# Altium PCB PCB2.PcbDoc
Units mil, origin at the board's own origin, x right, y up, seen from the top; angles counter-clockwise.
Board outline 2045 x 645 mil, 6 copper layers (Top Layer, Mid Layer 1, Mid Layer 2, Mid Layer 3, Mid Layer 4, Bottom Layer), stack 62.874 mil thick; 21 components, 25 nets, 101 pads, 71 vias.
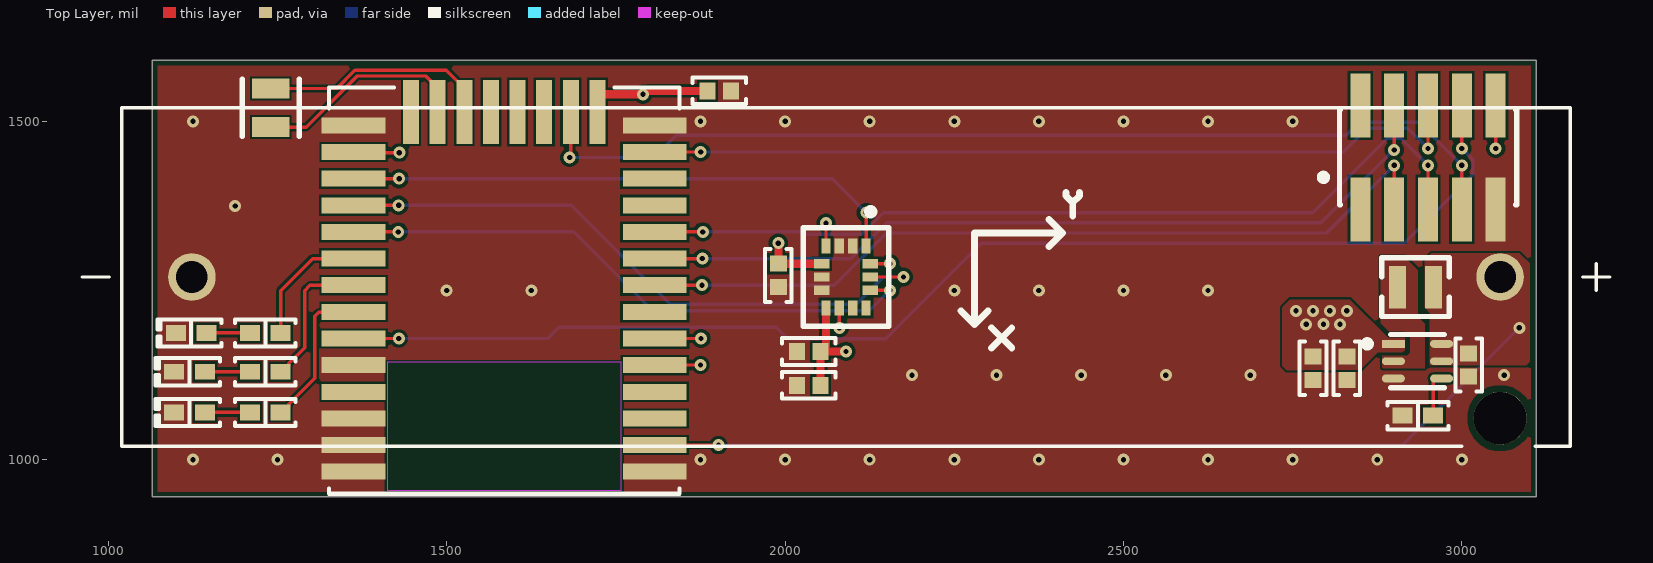
[diagram p0: Top Layer view]
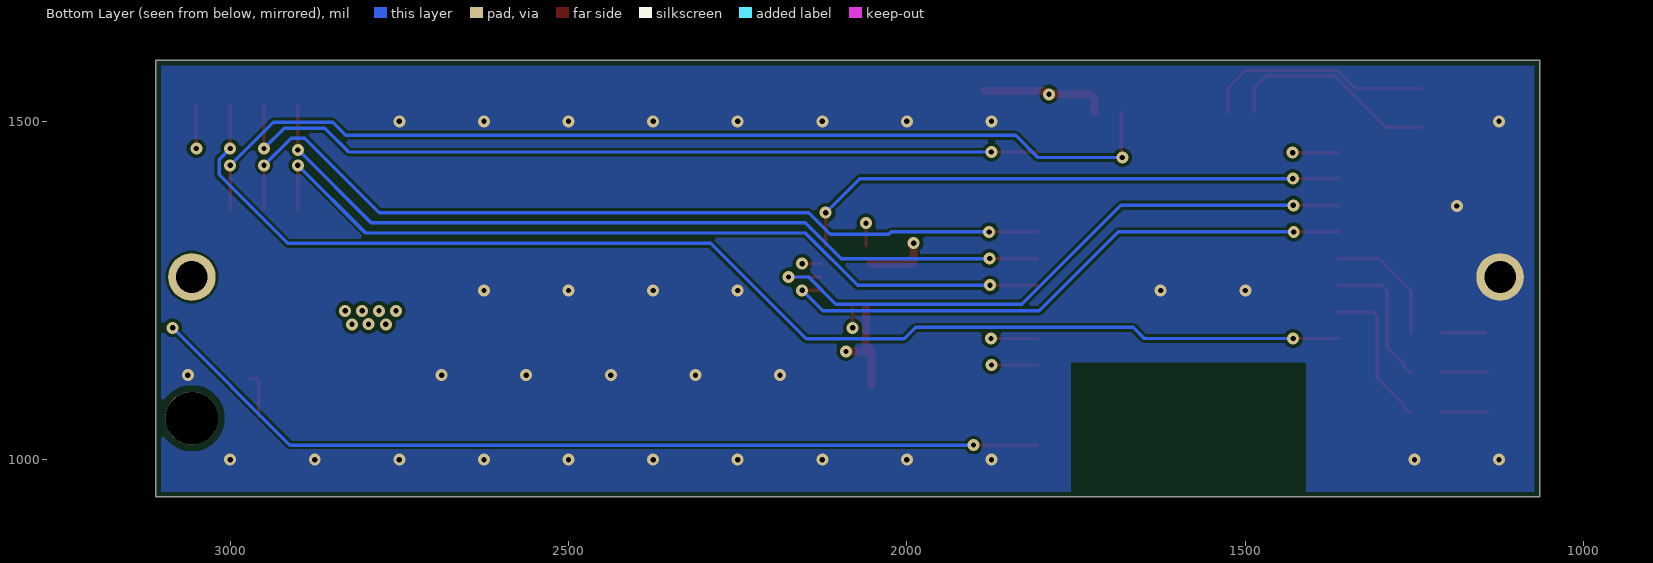
[diagram p1: Bottom Layer view, seen from below]
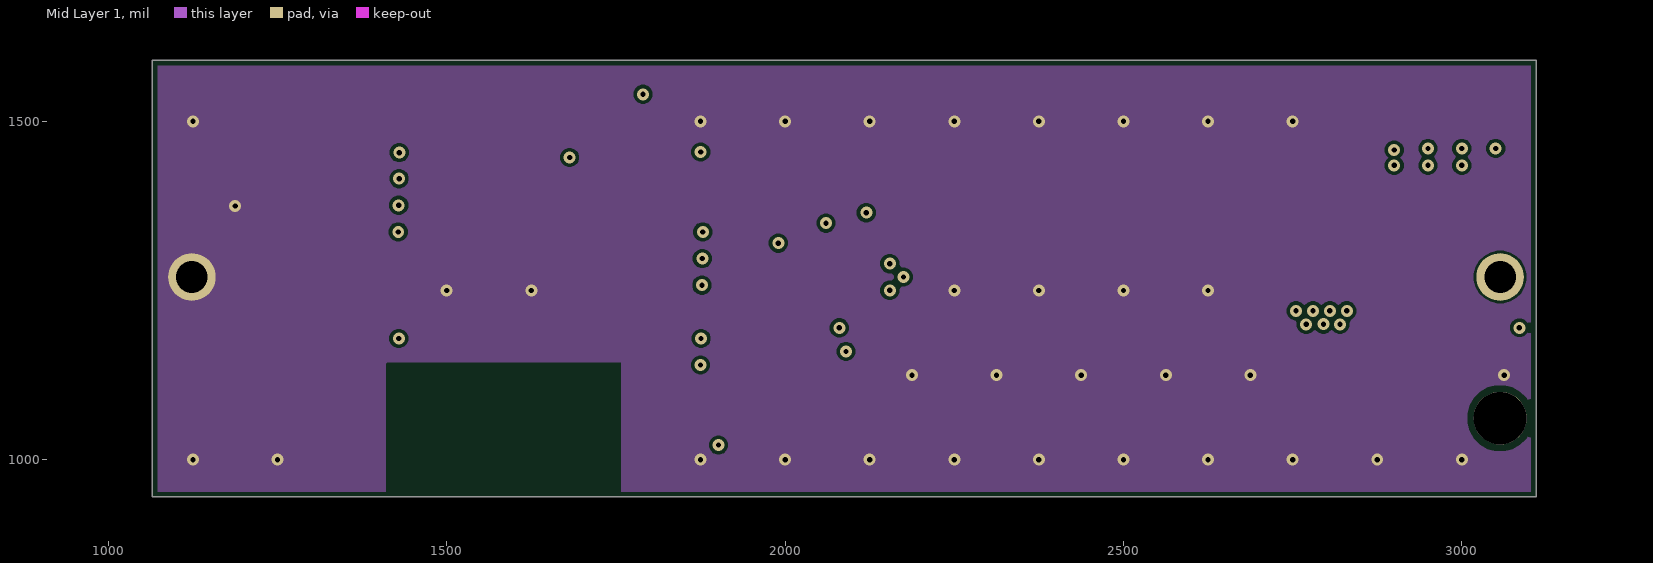
[diagram p2: Mid Layer 1]
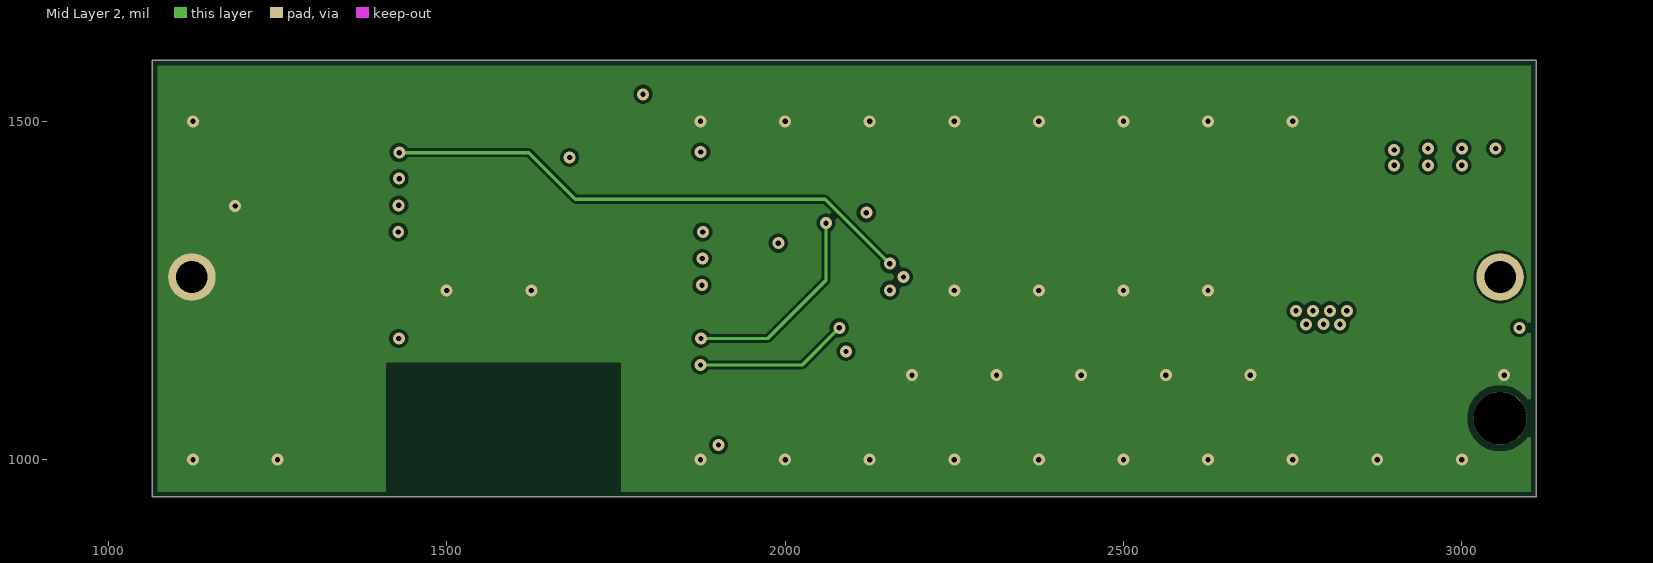
[diagram p3: Mid Layer 2]
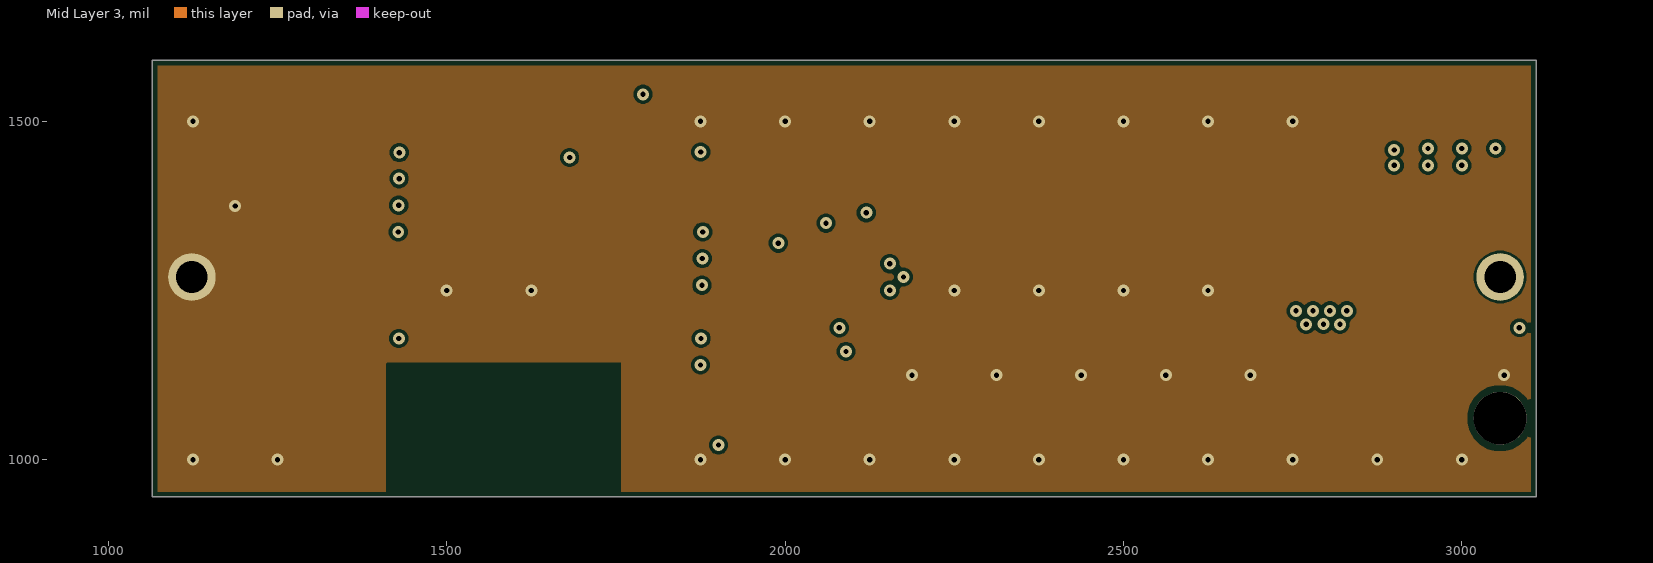
[diagram p4: Mid Layer 3]
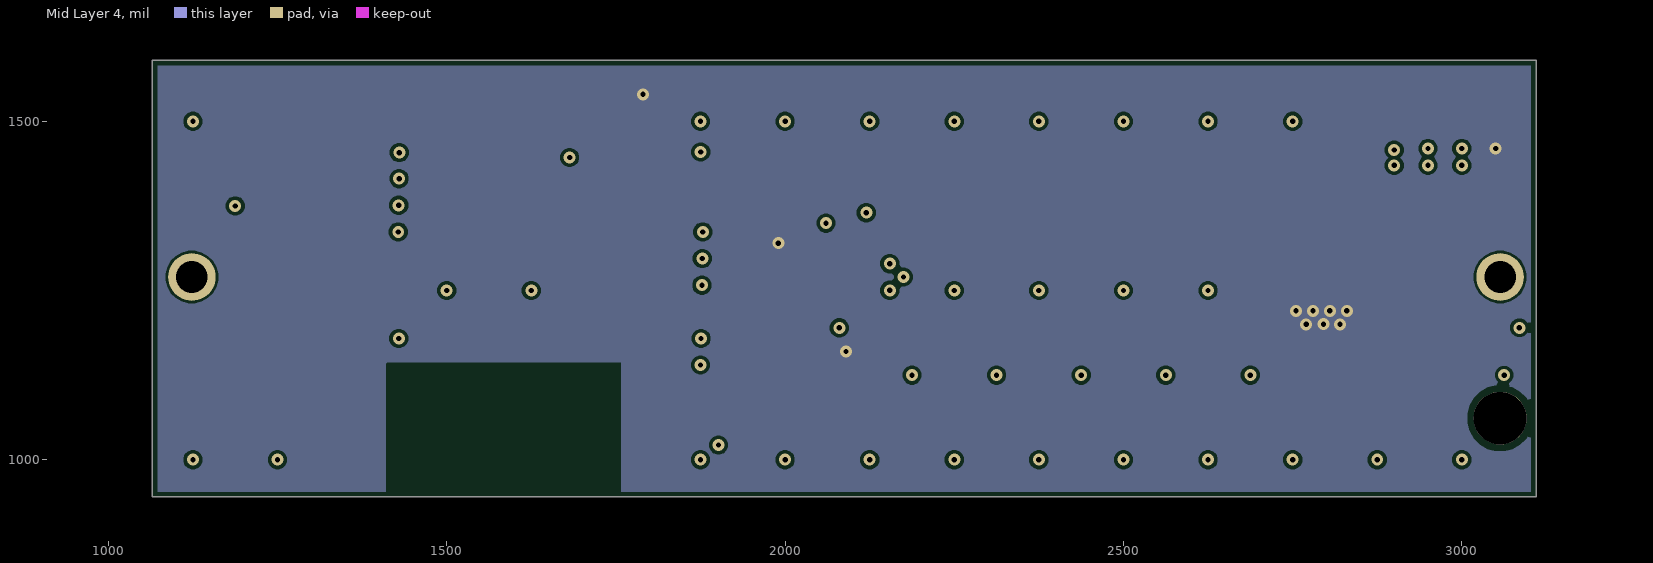
[diagram p5: Mid Layer 4]

## Layer stack, top to bottom
Top Solder: solder mask 0.5, Solder Resist, Dk 3.8
Top Layer: signal copper 1.378
Dielectric 1: prepreg 3.937, 2313, Dk 4.05
Mid Layer 1: signal copper 0.689
Core 1: core 22.2441, FR-4, Dk 4.5
Mid Layer 2: signal copper 0.689
Dielectric 2: prepreg 5, 2116, Dk 4.25
Mid Layer 3: signal copper 0.689
Core 2: core 22.2441, FR-4, Dk 4.5
Mid Layer 4: signal copper 0.689
Dielectric 3: prepreg 3.937, 2313, Dk 4.05
Bottom Layer: signal copper 1.378
Bottom Solder: solder mask 0.5, Solder Resist, Dk 3.8

## Board outline
1065,945 3110,945 3110,1590 1065,1590

## Design rules (kind name [scope] priority, off if disabled: settings)
BoardOutlineClearance [All] p1: gap=7.87 ignorepadtopadclearanceinfootprint=FALSE
Clearance [All] p1: gap=3.5 ignorepadtopadclearanceinfootprint=FALSE except(5: Arc-Via Track-Via SMDPad-Via THPad-Via Via-Via Via-Fill Via-Poly Via-Region Via-Text; 9.84: Arc-Hole Track-Hole SMDPad-Hole THPad-Hole Via-Hole Fill-Hole Poly-Hole Region-Hole Text-Hole)
ComponentClearance [All] p1: gap=3.5 collisioncheckmode=3 verticalgap=3.5 showdistances=TRUE
DiffPairsRouting [All] p1: maxlimit=3.5 minlimit=3.5 mostfreqgap=3.5 toplayer_minwidth=3.5 toplayer_maxwidth=71497.94 toplayer_prefwidth=3.5 midlayer1_minwidth=3.5 midlayer1_maxwidth=71497.94 midlayer1_prefwidth=3.5 midlayer2_minwidth=3.5 midlayer2_maxwidth=71497.94 midlayer2_prefwidth=3.5 midlayer3_minwidth=3.5 midlayer3_maxwidth=71497.94 midlayer3_prefwidth=3.5 midlayer4_minwidth=3.5 midlayer4_maxwidth=71497.94 midlayer4_prefwidth=3.5 bottomlayer_minwidth=3.5 bottomlayer_maxwidth=71497.94 bottomlayer_prefwidth=3.5 maxuncoupledlength=500
Height [All] p1: minheight=0 maxheight=71497.94 prefheight=500
HoleSize [All] p1: absolutevalues=TRUE maxlimit=248.03 minlimit=7.87 maxpercent=80.000 minpercent=20.000
HoleToHoleClearance [All] p1: gap=9.84 allowstackedmicrovias=FALSE
MinimumAnnularRing [All] p1: minimumring=3
MinimumSolderMaskSliver [All] p1: minsoldermaskwidth=0
PlaneClearance [All] p1: clearance=3.5
PlaneConnect PlaneConnectPowerPads [InPadClass('PowerPads')] p1: planeconnectstyle=Direct reliefexpansion=20 reliefentries=4 reliefconductorwidth=10 reliefairgap=10
PlaneConnect [All] p2: planeconnectstyle=Direct reliefexpansion=11.81 reliefentries=4 reliefconductorwidth=3.5 reliefairgap=3.5
PolygonConnect PolygonConnectPowerPads [All vs (InPadClass('PowerPads'))] p1: connectstyle=Direct reliefconductorwidth=10 reliefentries=4 polygonreliefangle="90 Angle" airgapwidth=10
PolygonConnect [All] p2: connectstyle=Direct reliefconductorwidth=3.5 reliefentries=4 polygonreliefangle="90 Angle" airgapwidth=3.5
RoutingVias [All] p1: holewidth=7.87 width=17.72 viastyle="Through Hole" minholewidth=7.87 minwidth=17.72 maxholewidth=248.03 maxwidth=257.87
SilkToSilkClearance [All] p1: silktosilkclearance=0
SilkToSolderMaskClearance [IsPad] p1: minsilkscreentomaskgap=3.5 clearancetoexposedcopper=TRUE
SolderMaskExpansion SolderMaskExpansion_Via [IsVia] p1: expansion=2.95 istentingtop=TRUE
SolderMaskExpansion [All] p2: expansion=2.95 istentingtop=FALSE
Width [All] p1: maxlimit=71497.94 minlimit=3.5 preferedwidth=3.5
20 further rules are at their usual default settings.

## Classes and differential pairs
component class main: BT1 C1 C2 C3 C4 C5 C6 C7 D1 D2 D3 J1 L1 R1 U2 U3

## Components (designator, comment, footprint, x,y, rotation, side; value= is the part's Value field where it differs from the comment)
BT1 "" BAT_1075 2090,1270 r180 top
C1 "" "CAP 0402_1005" 2035,1160 r180 top value="10 µF"
C2 "" "CAP 0402_1005" 3010,1140 r270 top value="10 µF"
C3 "" "CAP 0402_1005" 1902.68,1545 r180 top value="0.1 µF"
C4 "" "CAP 0402_1005" 1990,1272.32 r90 top value="0.1 µF"
C5 "" "CAP 0402_1005" 2830,1135 r90 top value="0.1 µF"
C6 "" "CAP 0402_1005" 2780,1135 r90 top value="0.1 µF"
C7 "" "CAP 0402_1005" 2035,1110 r0 top value="0.1 µF"
D1 "" "LED 0402_1005 YELLOW" 1122.36,1187.36 r180 top value=Yellow
D2 "" "LED 0402_1005 YELLOW" 1120,1130 r180 top value=Yellow
D3 "" "LED 0402_1005 YELLOW" 1120,1070 r180 top value=Yellow
J1 "" FP-62131021021-MFG 2950,1446.77 r0 top
L1 "" "TDK VLS201612CX" 2931.57,1255 r180 top value="2.2 µH"
R1 "" "RES 0402_1005" 1231.87,1187.36 r0 top value="1.5 kOhms"
R2 "" "RES 0402_1005" 1231.87,1130 r0 top value="1.5 kOhms"
R3 "" "RES 0402_1005" 1231.87,1070 r0 top
R4 "" "RES 0402_1005" 2935,1065 r0 top value=80.6k
U1 "" xGM240P 1585,1250 r180 top
U2 "" FP-L622-1C-IPC_B 2934.43,1145.59 r0 top
U3 "" FP-LGA-14L-DM00249496-MFG 2090,1270 r270 top
Y1 "" FP-ABS06-MFG 1240,1520 r270 top

## Footprints (in the part's own frame and the unit in brackets; to place one, negate y for a bottom-side part, rotate by r counter-clockwise, add the part's x,y. Pads: shape width x height; smd on the part's side, far side on the other; paste and mask are expansions set on the pad)
BAT_1075 [mm]
  round 1.785 hole 1.19: N(24.55,0) P(-24.55,0)
  round 1.98 hole 1.98 unplated: ""(-24.55,5.3)
  silkscreen extent -28.66,-6.35 28.66,6.35
"CAP 0402_1005" [mm] "Chip Capacitor, 2-Leads, Body 1.02x0.51mm, IPC Medium Density"
  rect 0.6x0.64 smd: 1(-0.44,0) 2(0.44,0)
  silkscreen extent -1,-0.5 1,0.5, body extent -0.5,-0.26 0.5,0.26, height 0.52
FP-62131021021-MFG [mm]
  rect 0.75x2.4 smd paste+0 mask+0: 1(-2.54,-1.95) 2(-2.54,1.95) 3(-1.27,-1.95) 4(-1.27,1.95) 5(0,-1.95) 6(0,1.95) 7(1.27,-1.95) 8(1.27,1.95) 9(2.54,-1.95) 10(2.54,1.95)
  silkscreen extent -4.05,-1.78 3.32,1.78, body extent -3.42,-3.25 3.42,3.25, height 0.25
FP-ABS06-MFG [mm]
  rect 0.75x1.4 smd paste+0 mask+0: 1(-0.725,0) 2(0.725,0)
  silkscreen extent -1.07,-1.07 1.07,1.07, body extent -1.2,-0.8 1.2,0.8, height 0.25
FP-L622-1C-IPC_B [mm]
  rect 0.865x0.292 smd paste+0 mask+0: 1(-0.904,0.65)
  rrect100% 0.865x0.292 smd paste+0 mask+0: 2(-0.904,0) 3(-0.904,-0.65) 4(0.904,-0.65) 5(0.904,0) 6(0.904,0.65)
  silkscreen extent -2.01,-1 1,1, body extent -1.59,-1.25 1.59,1.25, height 0.25
FP-LGA-14L-DM00249496-MFG [mm]
  rect 0.575x0.35 smd paste-1000 mask+0: 1(-1.162,0.75) 2(-1.162,0.25) 3(-1.162,-0.25) 4(-1.162,-0.75) 8(1.162,-0.75) 9(1.162,-0.25) 10(1.162,0.25) 11(1.162,0.75)
  rect 0.35x0.575 smd paste-1000 mask+0: 5(-0.5,-0.913) 6(0,-0.913) 7(0.5,-0.913) 12(0.5,0.913) 13(0,0.913) 14(-0.5,0.913)
  silkscreen extent -2.57,-1.6 1.85,1.6, body extent -2.05,-1.8 2.05,1.8, height 0.25
"LED 0402_1005 YELLOW" [mm] "Chip Diode, 2-Leads, Body 1.00x0.50mm, IPC Medium Density"
  rect 0.75x0.6 smd: 1(-0.575,0) 2(0.575,0)
  silkscreen extent -1.14,-0.51 1.27,0.51, body extent -0.5,-0.25 0.5,0.25, height 0.21
"RES 0402_1005" [mm] "Chip Resistor, 2-Leads, Body 1.0x0.5mm, IPC Medium Density"
  rect 0.75x0.6 smd: 1(-0.575,0) 2(0.575,0)
  silkscreen extent -1.14,-0.51 1.14,0.51, body extent -0.5,-0.25 0.5,0.25, height 0.35
"TDK VLS201612CX" [mm] "Inductor, 2-Leads, Body 2.00x1.60mm, IPC Medium Density"
  rect 0.65x1.6 smd: 1(-0.675,0) 2(0.675,0)
  silkscreen extent -1.27,-1.1 1.27,1.1, body extent -1,-0.8 1,0.8, height 1.2
xGM240P [mm]
  rect 2.4x0.6 smd paste+0 mask+0: 1(-5.65,6.8) 2(-5.65,5.8) 3(-5.65,4.8) 4(-5.65,3.8) 5(-5.65,2.8) 6(-5.65,1.8) 7(-5.65,0.8) 8(-5.65,-0.2) 9(-5.65,-1.2) 10(-5.65,-2.2) 11(-5.65,-3.2) 12(-5.65,-4.2) 13(-5.65,-5.2) 14(-5.65,-6.2) 23(5.65,-6.2) 24(5.65,-5.2) 25(5.65,-4.2) 26(5.65,-3.2) 27(5.65,-2.2) 28(5.65,-1.2) 29(5.65,-0.2) 30(5.65,0.8) 31(5.65,1.8) 32(5.65,2.8) 33(5.65,3.8) 34(5.65,4.8) 35(5.65,5.8) 36(5.65,6.8)
  rect 0.6x2.4 smd paste+0 mask+0: 15(-3.5,-6.7) 16(-2.5,-6.7) 17(-1.5,-6.7) 18(-0.5,-6.7) 19(0.5,-6.7) 20(1.5,-6.7) 21(2.5,-6.7) 22(3.5,-6.7)
  Top Layer keep-out region: 4.4,2.7 4.4,7.5 -4.4,7.5 -4.4,2.7
  silkscreen extent -6.58,-7.63 6.58,7.63

## Part data
BT1: library part CMP-342-000000-1, Package=None, Availability=Unavailable, Component Type=Standard, Design Item ID=1075, MP=1075, Pin Count=2, price=None, Source=1075.SchLib
C1 C2 C3 C4 C6 C7: library part C0402C104K7PAC7867, "CAP CER 0.1UF 4V X5R 0402", Capacitance="0.1 µF", Device Package="0402 (1005 Metric)", Manufacturer=KEMET, Operating Temperature="-55°C ~ 85°C", Supplier Part Number 1=399-14871-1-ND, Temperature Coefficient=X5R, Tolerance=±10%, Voltage - Rated=4V, Applications="Bypass, Decoupling", componentlink1description=Datasheet, componentlink1url=https://api.kemet.com/component-edge/download/datasheet/C0402C104K7PAC7867.pdf, ComponentLink2Description="DigiKey Link", ComponentLink2URL=https://www.digikey.com/en/products/detail/kemet/C0402C104K7PAC7867/7381987, lastupdated="1/9/2022 12:30:40 pm", Lifecycle Status=Active, Minimum Order=1, Mounting Type="Surface Mount, MLCC", Package / Case="0402 (1005 Metric)", packaging=TapeAndReel, Part Number=C0402C104K7PAC7867, Part Status=Active, partid=5603, price=0.01, series="SMD Comm X5R", Size / Dimension="0.039\" L x 0.020\" W (1.00mm x 0.50mm)", Supplier 1=DigiKey, Thickness (Max)="0.022\" (0.55mm)"
C5: library part C0402C104K4RECAUTO, "CAP CER 0402 0.1UF 16V X7R 10%", Capacitance="0.1 µF", Device Package="0402 (1005 Metric)", Manufacturer=KEMET, Operating Temperature="-55°C ~ 125°C", Ratings=AEC-Q200, Supplier Part Number 1=399-17167-1-ND, Temperature Coefficient=X7R, Tolerance=±10%, Voltage - Rated=16V, Applications="Automotive, ESD Protection", componentlink1description=Datasheet, componentlink1url=https://api.kemet.com/component-edge/download/datasheet/C0402C104K4RECAUTO.pdf, ComponentLink2Description="DigiKey Link", ComponentLink2URL=https://www.digikey.com/en/products/detail/kemet/C0402C104K4RECAUTO/8563695, lastupdated="1/9/2022 12:30:53 pm", Lifecycle Status=Active, Minimum Order=1, Mounting Type="Surface Mount, MLCC", Package / Case="0402 (1005 Metric)", packaging=TapeAndReel, Part Number=C0402C104K4RECAUTO, Part Status=Active, partid=1731, price=0.01, series="ESD SMD Auto X7R", Size / Dimension="0.039\" L x 0.020\" W (1.00mm x 0.50mm)", Supplier 1=DigiKey, Thickness (Max)="0.022\" (0.55mm)"
D1 D2 D3: library part BL-HKC37A-AV-TRB, "0402 YELLOW", Color=Yellow, Current - Test=20mA, Device Package="0402 (1005 Metric)", Lens Color=Colorless, Manufacturer="American Bright Optoelectronics Corporation", Millicandela Rating=120mcd, Supplier Device Package=0402, Supplier Part Number 1=BL-HKC37A-AV-TRBCT-ND, Voltage - Forward (Vf) (Typ)=2.2V, componentlink1description=Datasheet, componentlink1url=https://americanbrightled.com/pdffiles/smt/BL-HKC37A-AV-TRB.pdf, ComponentLink2Description="DigiKey Link", ComponentLink2URL=https://www.digikey.com/en/products/detail/american-bright-optoelectronics-corporation/BL-HKC37A-AV-TRB/9678171, Configuration=Standard, Height (Max)=0.45mm, lastupdated="11/9/2022 10:29:51 am", Lens Style="Rectangle with Flat Top", Lens Transparency=Clear, Lifecycle Status=Active, Minimum Order=1, Mounting Type="Surface Mount", Package / Case="0402 (1005 Metric)", packaging=TapeAndReel, Part Number=BL-HKC37A-AV-TRB, Part Status=Active, partid=1041, price=0.06, series=-, Size / Dimension="1.00mm L x 0.50mm W", Supplier 1=DigiKey, Viewing Angle=120°, Wavelength - Dominant=589nm, Wavelength - Peak=590nm
J1: library part CMP-1502-00938-2, "1.27mm SMT Straight Dual Pin Header WR-PHD", RoHS Compliant=Yes
L1: library part VLS201612CX-6R8M-1, "FIXED IND 6.8UH 930MA 368MOHM SM", Current - Saturation=730mA, Current Rating (Amps)="930 mA", DC Resistance (DCR)="368mOhm Max", Device Package=Nonstandard, Inductance="6.8 µH", Inductance Frequency - Test="1 MHz", Manufacturer="TDK Corporation", Operating Temperature="-40°C ~ 105°C", Supplier Device Package=2016, Supplier Part Number 1=445-172966-1-ND, Tolerance=±20%, componentlink1description=Datasheet, componentlink1url=https://product.tdk.com/info/en/catalog/datasheets/inductor_commercial_power_vls201612cx-1_en.pdf?ref_disty=digikey, ComponentLink2Description="DigiKey Link", ComponentLink2URL=https://www.digikey.com/en/products/detail/tdk-corporation/VLS201612CX-6R8M-1/5169771, Height - Seated (Max)="0.047\" (1.20mm)", lastupdated="11/9/2022 10:31:03 am", Lifecycle Status=Active, Material - Core=Ferrite, Minimum Order=1, Mounting Type="Surface Mount", Package / Case=Nonstandard, packaging=TapeAndReel, Part Number=VLS201612CX-6R8M-1, Part Status=Active, partid=207, price=0.13, series=VLS-CX-1, Shielding=Shielded, Size / Dimension="0.079\" L x 0.063\" W (2.00mm x 1.60mm)", Supplier 1=DigiKey, Type="Drum Core, Wirewound"
R1 R2 R3 R4: library part ERA-2VRW1501X, "RES 1.5K OHM 0.05% 1/10W 0402", Device Package="0402 (1005 Metric)", Manufacturer="Panasonic Electronic Components", Operating Temperature="-55°C ~ 155°C", Power (Watts)="0.1W, 1/10W", Ratings=AEC-Q200, Resistance="1.5 kOhms", Supplier Device Package=0402, Supplier Part Number 1=10-ERA-2VRW1501XCT-ND, Temperature Coefficient=±10ppm/°C, Tolerance=±0.05%, componentlink1description=Datasheet, componentlink1url=https://api.pim.na.industrial.panasonic.com/file_stream/main/fileversion/9152, ComponentLink2Description="DigiKey Link", ComponentLink2URL=https://www.digikey.com/en/products/detail/panasonic-electronic-components/ERA-2VRW1501X/12086957, Composition="Thin Film", Features="Anti-Sulfur, Automotive AEC-Q200", Height - Seated (Max)="0.016\" (0.40mm)", lastupdated="11/9/2022 9:53:08 am", Lifecycle Status=Active, Minimum Order=1, Number of Terminations=2, Package / Case="0402 (1005 Metric)", packaging=TapeAndReel, Part Number=ERA-2VRW1501X, Part Status=Active, partid=67400, price=0.24, series=ERA-2V, Size / Dimension="0.039\" L x 0.020\" W (1.00mm x 0.50mm)", Supplier 1=DigiKey
U1: library part MGM240PB32VNA3, "No Description Available", Mfr_Name="Silicon Labs", RefDes=RefDes, Type=Type
U2: library part CMP-05722-000389-1, "IC REG BOOST ADJ 500MA 6UDFN", Max Input Voltage=5.5V, Max Operating Temperature=85°C, Max Output Voltage=5V, Min Input Voltage=400mV, Min Operating Temperature=-40°C, Min Output Voltage=1.8V, Output Current=500mA, Switching Frequency=2.5MHz, Mount="Surface Mount", Number Of Outputs=1, Number of Pins=6, Output Configuration=Positive, Output Type=Adjustable, packaging="Tape and Reel", RoHS Compliant=Yes, Synchronous Rectifier=Yes, Topology=Boost
U3: library part CMP-12175-000007-1, "ULTRA-WIDE BANDWIDTH, LOW-NOISE", Frequency=6.3kHz, Manufacturer=STMicroelectronics, Manufacturer Part Number=IIS3DWBTR, Max Supply Voltage=3.6V, Min Supply Voltage=2.1V, Operating Supply Current=1.1mA, Package=LGA-14L-DM00249496, Temperature="-40°C to +105°C", Temperature Range High=+105°C, Temperature Range Low=-40°C, Accel Axis="X+Y and Z", Accel Range=2/4/8/16g, Accel Sensitivity=61-488LSB/g, Automotive=No, Category=IC, ComponentLink2Description=Datasheet, ComponentLink2URL=https://www.st.com/content/ccc/resource/technical/document/datasheet/group3/14/0e/2b/1d/77/d0/46/f6/DM00501492/files/DM00501492.pdf/jcr:content/translations/en.DM00501492.pdf, Device Class L1=Sensors, Device Class L2="Motion Sensors", Device Class L3=Accelerometers, Digikey Description="ULTRA-WIDE BANDWIDTH, LOW-NOISE", Footprint Url=https://www.st.com/content/ccc/resource/technical/document/technical_note/73/17/9c/16/dd/96/4a/01/CD00134799.pdf/files/CD00134799.pdf/jcr:content/translations/en.CD00134799.pdf, Height=0.86mm, Lead Free=Yes, Octopart=https://octopart.com/iis3dwbtr-stmicroelectronics-107245748, RoHS=TRUE, Sensor Output=I2C,SPI
Y1: library part CMP-27762-003430-2, "Crystal 32.768kHz ±10ppm (Tol) 9pF FUND 90kΩ 2-Pin Mini-CSMD T/R", Case/Package=CSMD, ESR (Equivalent Series Resistance)=90kR, Frequency=32.768kHz, Frequency Tolerance=10ppm, Load Capacitance=9pF, Max Operating Temperature=85°C, Min Operating Temperature=-40°C, Package Quantity=3000, Depth=1.2mm, Height=0.6mm, Length=2mm, Mount="Surface Mount", Number of Pins=2, packaging="Tape and Reel", Radiation Hardening=No, REACH SVHC="No SVHC", RoHS Compliant=Yes, series=ABS06, Series Resistance=90kR, Termination=SMD/SMT, Tolerance=10ppm, Width=1.2mm

## Via types
v1: diameter 17.72, hole 7.87, Top Layer to Bottom Layer, tented both sides, 71 vias

## Nets (pads, with @x,y where several pads share a name; then routed paths per layer and width w, separated by ;. In a path a pad name is that pad's centre, name@x,y a point inside that pad or via, vN(x,y) a via of type N, cw(c..) or ccw(c..) an arc to the next point about the centre after c; other vN are vias at no path point)
3V3: C1.1 C3.2 C4.2 C5.2 C6.2 C7.2 J1.10 U1.15 U2.1 U3.5 U3.8 | length 500.7
  Top Layer w5: v1(3050,1460) J1.10
  Top Layer w12: U1.15 1722.8,1534.19 1728.61,1540 v1(1790,1540) 1791.55,1540 1796.55,1545 C3.2 ; v1(1990,1320) C4.2 U3.5 ; C7.2 C1.1 ; U3.8 2060.3,1224.06 2060.3,1168.76 2052.32,1160.79 C1.1 ; v1(2090,1160) C1.1
  other v1: 2770,1200 2795.49,1200.36 2820,1200 2755,1220 2780,1220 2805,1220 2830,1220
CS: U1.27 U3.12 | length 881.7
  Top Layer w5: U1.27 v1(1428.39,1336.61) ; U3.12 v1(2154.68,1250.32)
  Bottom Layer w5: v1(1428.39,1336.61) 1687.61,1336.61 1804.22,1220 2124.37,1220 v1(2154.68,1250.32)
GND: BT1.N C1.2 C2.2 C3.1 C4.1 C5.1 C6.1 C7.1 D1.2 D2.2 D3.2 J1.9 R4.1 U1.1 U1.14 U1.23 U1.32 U1.34 U1.35 U1.36 U2.3 U3.2 U3.3 U3.6 U3.7
  other v1: 1125,1000 1250,1000 1875,1000 2000,1000 2125,1000 2250,1000 2375,1000 2500,1000 2625,1000 2750,1000 2875,1000 3000,1000 2187.5,1125 2312.5,1125 2437.5,1125 2562.5,1125 2687.5,1125 3062.5,1125 1500,1250 1625,1250 2250,1250 2375,1250 2500,1250 2625,1250 1187.5,1375 1125,1500 1875,1500 2000,1500 2125,1500 2250,1500 2375,1500 2500,1500 2625,1500 2750,1500
INT1: U1.6 U3.4 | length 406.6
  Top Layer w5: U1.6 v1(1875.87,1179.13) ; U3.4 v1(2060.47,1349.53)
  Mid Layer 2 w5: v1(1875.87,1179.13) 1974.13,1179.13 2060.47,1265.47 v1(2060.47,1349.53)
INT2: U1.5 U3.9 | length 324.9
  Top Layer w5: U1.5 1807.68,1140 v1(1875,1140) ; v1(2080.16,1194.84) U3.9
  Mid Layer 2 w5: v1(1875,1140) 2025.32,1140 v1(2080.16,1194.84)
NetD1_1: D1.1 R1.1 | length 64.2
  Top Layer w5: D1.1 R1.1
NetD2_1: D2.1 R2.1 | length 66.6
  Top Layer w5: D2.1 R2.1
NetD3_1: D3.1 R3.1 | length 66.6
  Top Layer w5: D3.1 R3.1
NetL1_2: L1.2 U2.2
NetR1_2: R1.2 U1.28 | length 190
  Top Layer w5: R1.2 1254.51,1249.51 1302.24,1297.24 U1.28
NetR2_2: R2.2 U1.29 | length 212.3
  Top Layer w5: R2.2 1257.46,1130 1266.78,1139.31 1266.78,1142.26 1290,1165.49 1290,1250 1297.87,1257.87 U1.29
NetR3_2: R3.2 U1.30 | length 225.1
  Top Layer w5: R3.2 1257.46,1070 1266.78,1079.31 1266.78,1082.26 1305,1120.49 1305,1212.31 1310.74,1218.05 1362.11,1218.05 U1.30
NetR4_2: R4.2 U2.4 | length 65.6
  Top Layer w5: R4.2 2957.64,1116.99 2960.65,1120 U2.4
NetU1_20: U1.20 Y1.1 | length 343.5
  Top Layer w5: Y1.1 1337.45,1548.54 1364.43,1575.52 1499.63,1575.52 1525.94,1549.21 U1.20
NetU1_21: U1.21 Y1.2 | length 320.7
  Top Layer w5: Y1.2 1292.38,1491.46 1367.95,1567.02 1468.76,1567.02 1486.57,1549.21 U1.21
nRST: J1.8 U1.31 | length 1877.2
  Top Layer w5: U1.31 v1(1429.13,1179.13) ; v1(3000,1460) J1.8
  Bottom Layer w5: v1(1429.13,1179.13) 1649.43,1179.13 1665.79,1195.49 1987.22,1195.49 2004.22,1178.48 2148.48,1178.48 2290,1320 2915,1320 3016.36,1421.36 3016.36,1443.64 v1(3000,1460)
RX: J1.7 U1.16 | length 1499.2
  Top Layer w5: v1(1681.57,1446.57) 1683.43,1448.43 U1.16 ; J1.7 v1(3000,1435)
  Bottom Layer w5: v1(1681.57,1446.57) 1806.57,1446.57 1839.25,1479.25 2829.25,1479.25 2848.5,1498.5 2936.5,1498.5 v1(3000,1435)
SCK: U1.26 U3.13 | length 938.6
  Top Layer w5: U1.26 v1(1429.02,1375.98) ; U3.13 v1(2175,1270)
  Bottom Layer w5: v1(1429.02,1375.98) 1684.02,1375.98 1830,1230 2105,1230 2145,1270 v1(2175,1270)
SDI: U1.24 U3.14 | length 890.5
  Top Layer w5: U1.24 1363.46,1453.82 v1(1429.88,1453.82) v1@1431.18,1453.82 ; U3.14 v1(2154.68,1289.68)
  Mid Layer 2 w5: v1(1429.88,1453.82) 1621.18,1453.82 1690,1385 2059.37,1385 v1(2154.68,1289.68)
SDO: U1.25 U3.1 | length 827.7
  Top Layer w5: U1.25 v1(1429.65,1415.35) ; U3.1 2119.76,1316 2119.76,1364.76 v1(2120,1365)
  Bottom Layer w5: v1(1429.65,1415.35) 2069.65,1415.35 v1(2120,1365)
SWDCLK: J1.3 U1.8 | length 1230.9
  Top Layer w5: U1.8 v1(1877.13,1257.87) ; J1.3 v1(2900,1435)
  Bottom Layer w5: v1(1877.13,1257.87) 2072.87,1257.87 2150,1335 2800,1335 v1(2900,1435)
SWDIO: J1.4 U1.9 | length 1224.9
  Top Layer w5: U1.9 v1(1877.76,1297.24) ; v1(2900,1457.72) J1.4
  Bottom Layer w5: v1(1877.76,1297.24) 2097.24,1297.24 2150,1350 2791.87,1350 2899.58,1457.72 v1(2900,1457.72)
SWO: J1.5 U1.10 | length 1284.3
  Top Layer w5: U1.10 v1(1878.39,1336.61) ; J1.5 v1(2950,1435)
  Bottom Layer w5: v1(1878.39,1336.61) 2023.39,1336.61 2026.83,1333.17 2113.17,1333.17 2145,1365 2780,1365 2890,1475 2910,1475 v1(2950,1435)
TX: J1.6 U1.13 | length 1233.1
  Top Layer w5: U1.13 v1(1875.28,1454.72) ; v1(2950,1460) J1.6
  Bottom Layer w5: v1(1875.28,1454.72) 2824.72,1454.72 2860,1490 2920,1490 v1(2950,1460)
VBAT: BT1.P C2.1 L1.1 U1.2 U2.5 U2.6 | length 1349.4
  Top Layer w5: U1.2 v1(1901.65,1021.65)
  Bottom Layer w5: v1(1901.65,1021.65) 2911.65,1021.65 v1(3085,1195)
pads on no net: BT1. J1.1 J1.2 U1.3 U1.4 U1.7 U1.11 U1.12 U1.17 U1.18 U1.19 U1.22 U1.33 U3.10 U3.11

## Polygon pours and split planes (outlines as drawn)
GND on Top Layer "NONET_L01_P-001" (solid, pour order 3): 1066.77,946.77 1065,1590 3110,1590 3110,945 1760,945 1758.23,946.77 1758.23,1143.7 1411.77,1143.7 1410,1141.93 1410,945
3V3 on Top Layer "NONET_L01_P-001" (solid, pour order 2): 2915.03,1161.18 2915.52,1161.67 2915.52,1180.12 2890.93,1180.12 2834.36,1236.69 2745.82,1236.69 2734.75,1225.62 2734.75,1138.8 2741.14,1132.4 2849.12,1132.4 2875.43,1158.72 2911.59,1158.72
NetL1_2 on Top Layer "NONET_L01_P-001" (solid, pour order 1): 2882.37,1153.83 2918.69,1153.83 2918.98,1153.53 2923.71,1158.26 2923.71,1180.99 2914.55,1190.14 2891.82,1190.14 2880,1201.96 2880,1300 2915,1300 2935,1280 2935,1211.03 2945,1201.03 2945,1135 2884.08,1135 2882.37,1136.71
VBAT on Top Layer "NONET_L01_P-001" (solid, pour order 0): 2952.64,1140.25 2952.64,1217.36 2945,1225 2945,1295 2955,1305 3085,1305 3100,1290 3100,1145 3094.95,1139.95 2952.93,1139.95
GND on Mid Layer 1 "NONET_L01_P-001" (solid, pour order 5): 1066.77,946.77 1065,1590 3110,1590 3110,945 1760,945 1758.23,946.77 1758.23,1143.7 1411.77,1143.7 1410,1141.93 1410,945
3V3 on Mid Layer 4 "NONET_L01_P-001" (solid, pour order 6): 1066.77,946.77 1065,1590 3110,1590 3110,945 1760,945 1758.23,946.77 1758.23,1143.7 1411.77,1143.7 1410,1141.93 1410,945
GND on Bottom Layer "NONET_L01_P-001" (solid, pour order 7): 1066.77,946.77 1065,1590 3110,1590 3110,945 1760,945 1758.23,946.77 1758.23,1143.7 1411.77,1143.7 1410,1141.93 1410,945
GND on Mid Layer 2 "NONET_L01_P-001" (solid, pour order 8): 1066.77,946.77 1065,1590 3110,1590 3110,945 1760,945 1758.23,946.77 1758.23,1143.7 1411.77,1143.7 1410,1141.93 1410,945
GND on Mid Layer 3 "NONET_L01_P-001" (solid, pour order 9): 1066.77,946.77 1065,1590 3110,1590 3110,945 1760,945 1758.23,946.77 1758.23,1143.7 1411.77,1143.7 1410,1141.93 1410,945

## Silkscreen, mask and mechanical layers (free items; w line width, h text height)
Top Overlay:
  lines w10: 2260,1220 2280,1200 ; 2300,1220 2280,1200 ; 2305,1165 2335,1195 ; 2305,1195 2335,1165 ; 2390,1315 2410,1335 ; 2390,1355 2410,1335 ; 2415,1395 2415,1390 2425,1380 ; 2425,1360 2425,1380 ; 2435,1395 2435,1390 2425,1380 ; 2280,1200 2280,1335 2410,1335

## Text inside footprints (layer, text, board x,y; h text height)
U1: Mechanical 13 "*" at 1747.7,1007.28 h50 r180